# Altium PCB TK511_DC-PSU.PcbDoc
Units mm, origin at the board's own origin, x right, y up, seen from the top; angles counter-clockwise.
Board outline 60.32 x 53.97 mm, 2 copper layers (Top Layer, Bottom Layer); 24 components, 8 nets, 57 pads, 6 vias.
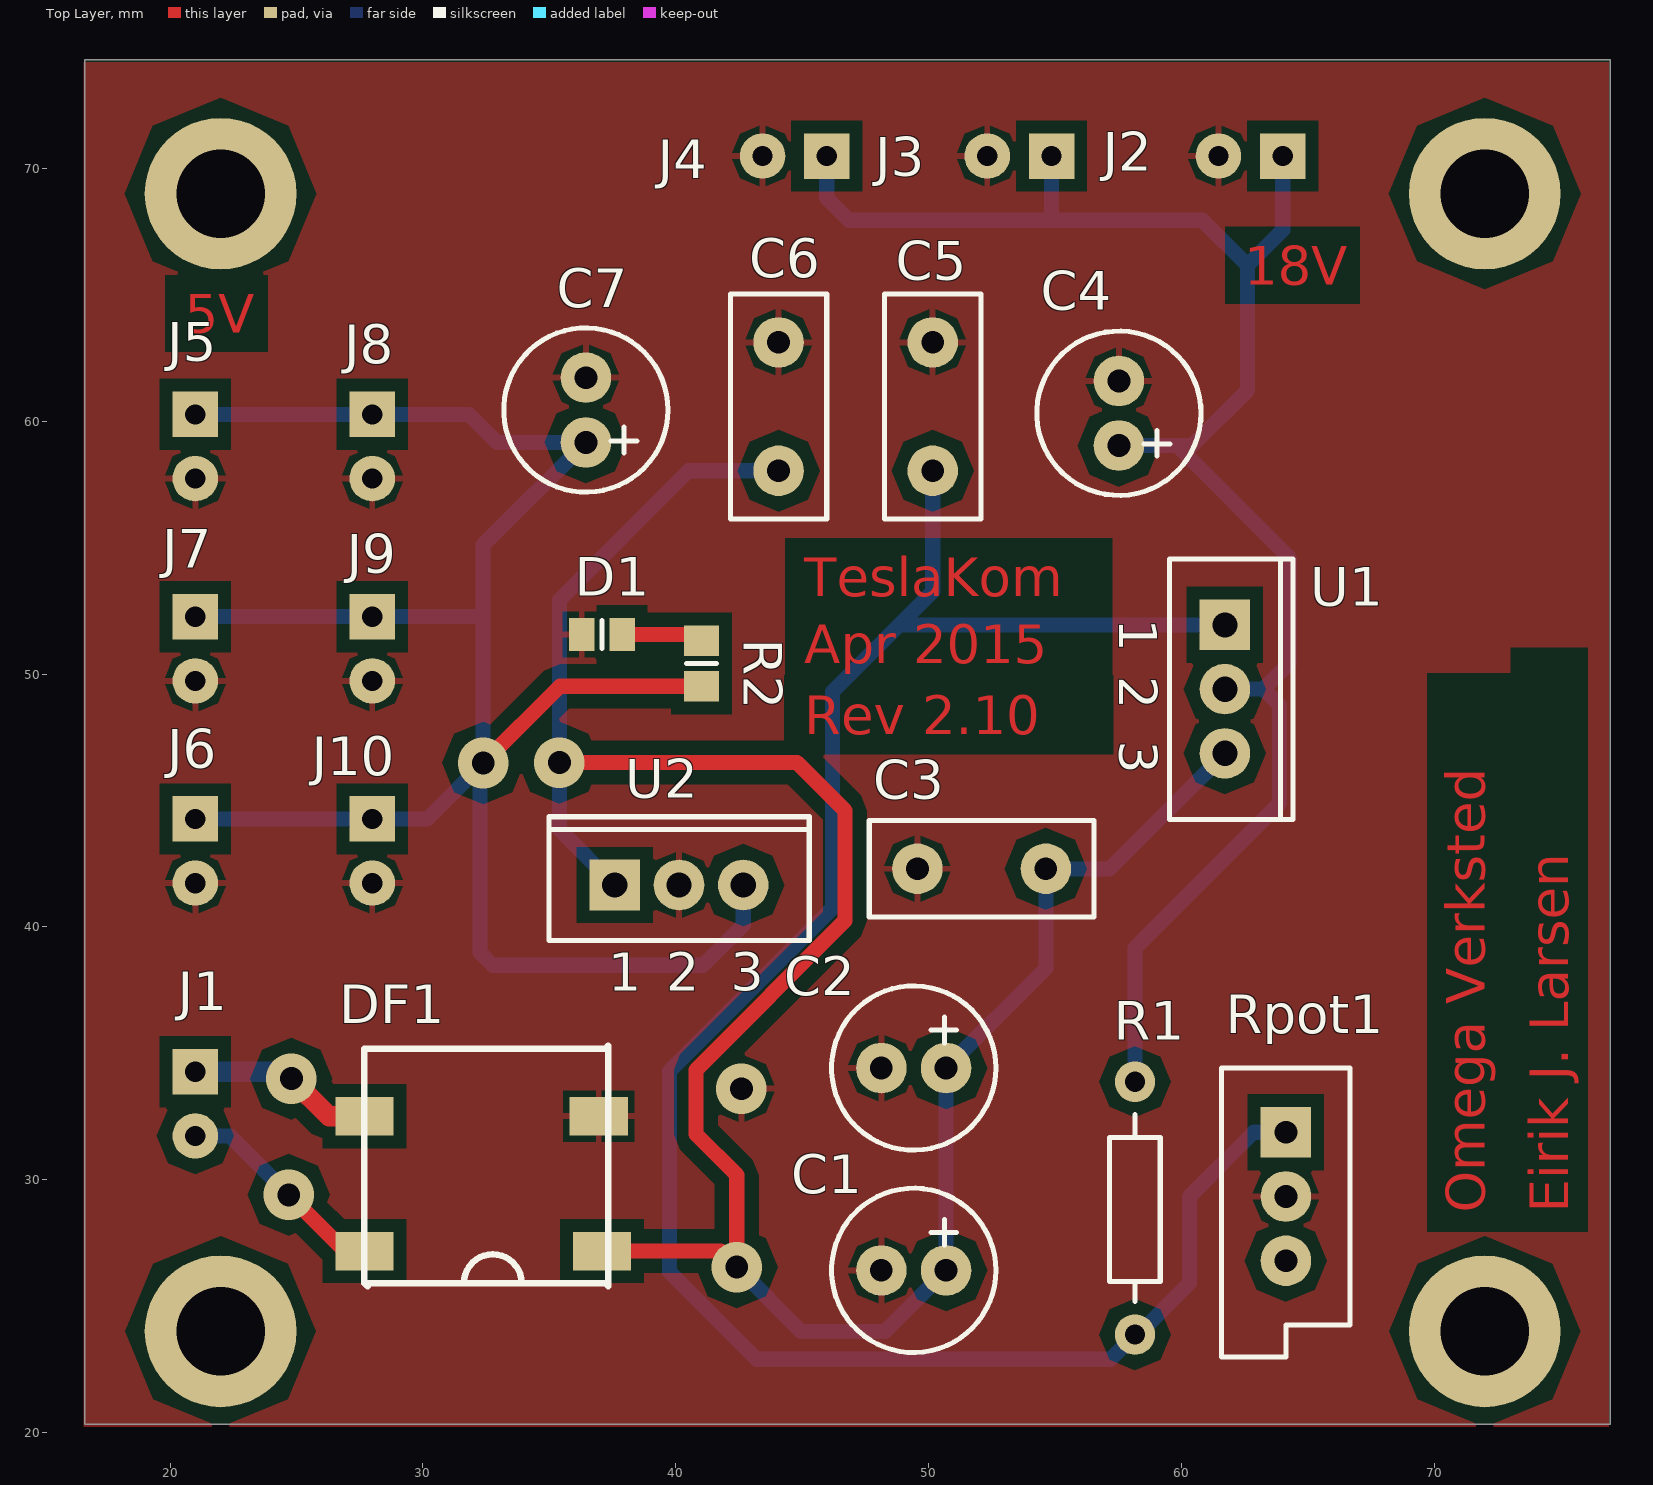
[diagram p0: Top Layer view]
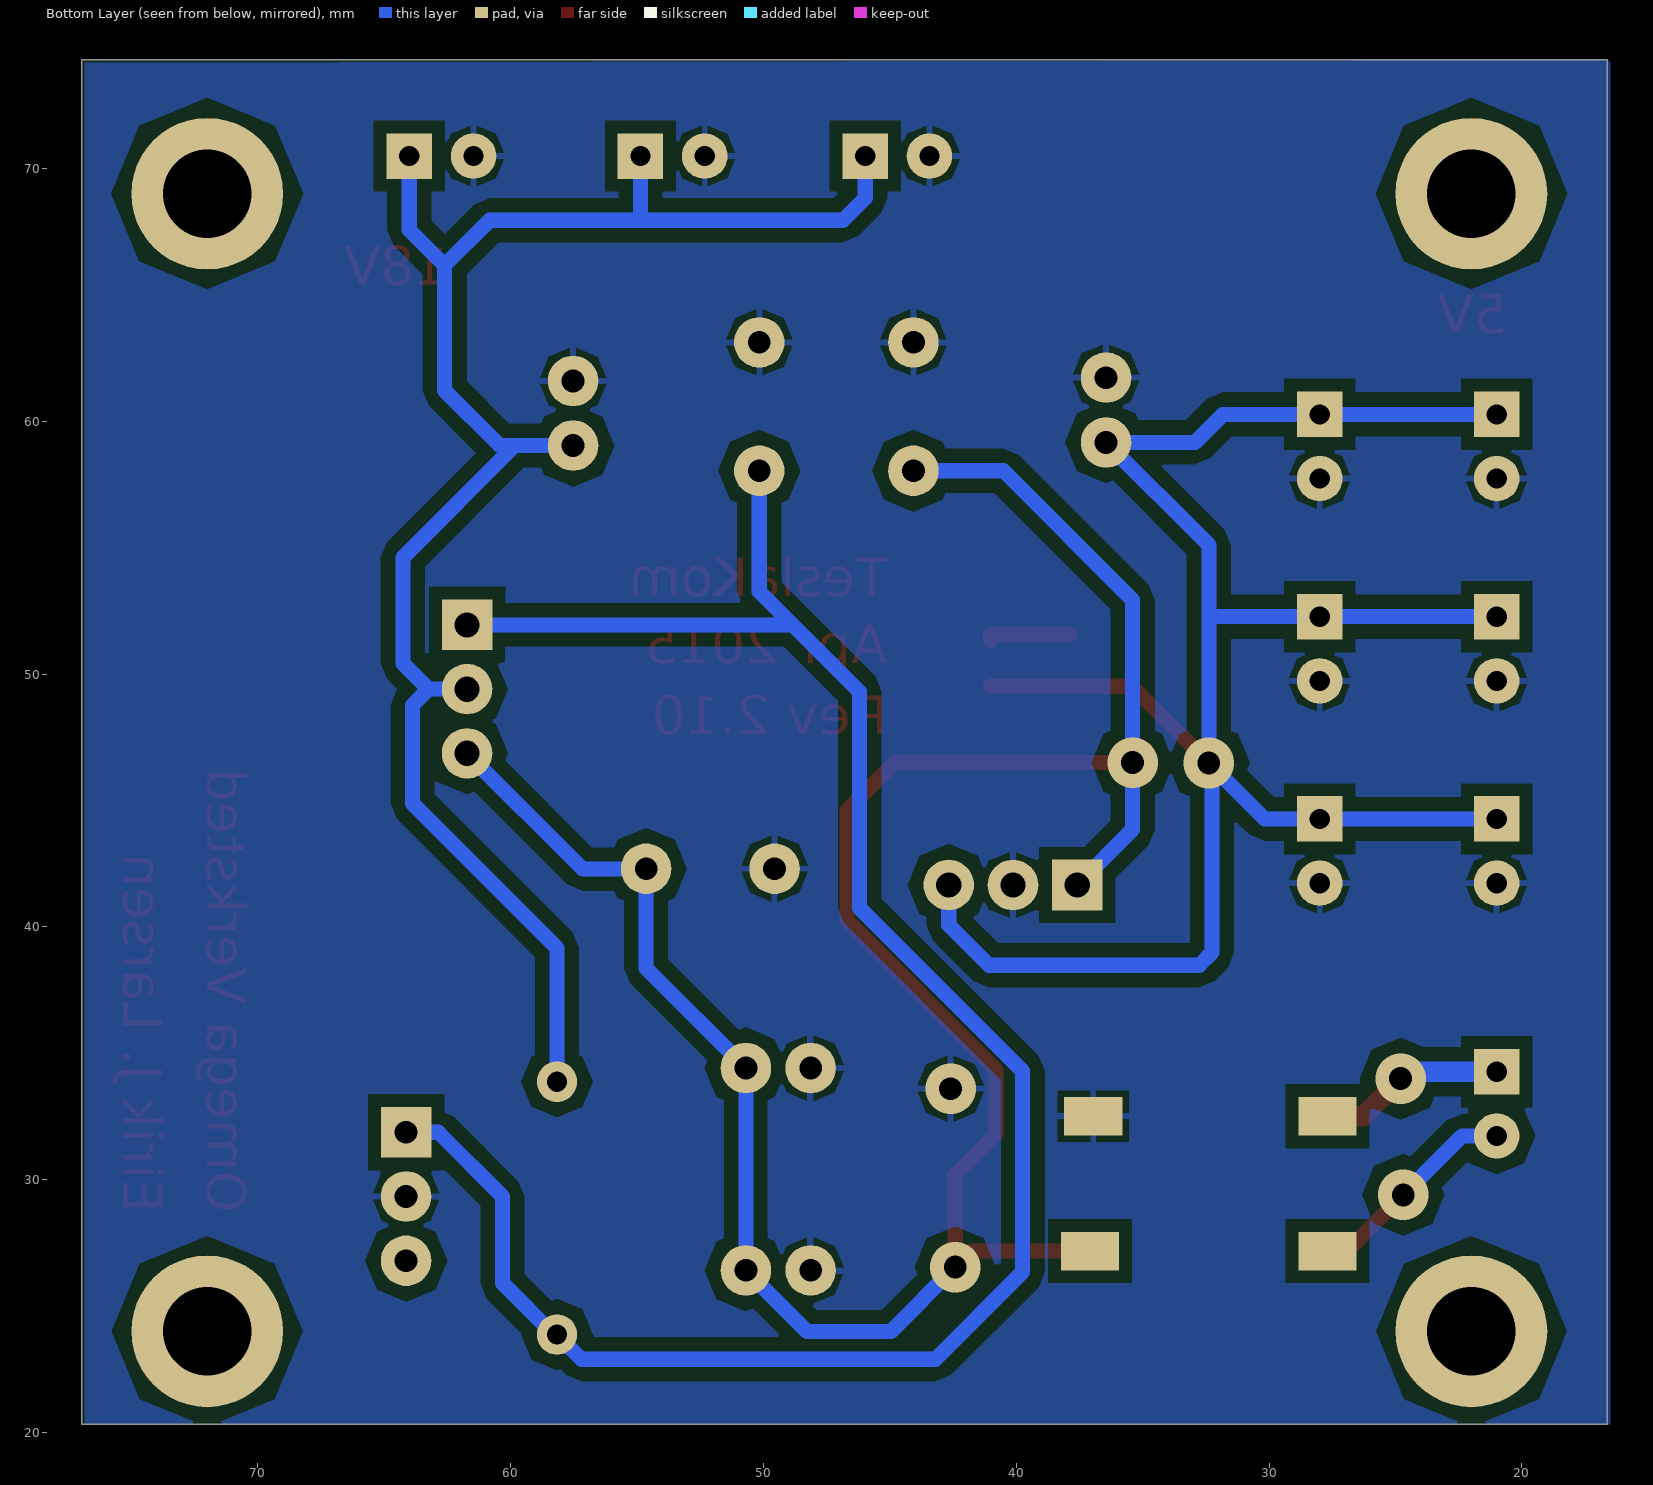
[diagram p1: Bottom Layer view, seen from below]

## Layer stack, top to bottom
Top Solder: solder mask 0.0102, Solder Resist, Dk 3.5
Top Layer: signal copper 0.0356
Dielectric1: dielectric 0.32, FR-4, Dk 4.8
Bottom Layer: signal copper 0.0356
Bottom Solder: solder mask 0.0102, Solder Resist, Dk 3.5

## Board outline
16.637,74.295 16.637,20.32 76.835,20.32 76.962,20.32 76.962,74.295

## Design rules (kind name [scope] priority, off if disabled: settings)
Clearance [All] p1: gap=0.16 except(0: Arc-Text Track-Text SMDPad-Text THPad-Text Via-Text Fill-Text Poly-Text Region-Text Text-Text)
Height [All] p1: minheight=0 maxheight=200 prefheight=12.7
HoleSize [All] p1: absolutevalues=TRUE maxlimit=6.35 minlimit=0.3 maxpercent=80.000 minpercent=20.000
MinimumSolderMaskSliver [All] p1: minsoldermaskwidth=0.1
PlaneClearance [All] p1: clearance=1
PlaneConnect [All] p1: planeconnectstyle=Relief reliefexpansion=0.508 reliefentries=4 reliefconductorwidth=1 reliefairgap=0.254
PolygonConnect [All] p1: connectstyle=Direct reliefconductorwidth=0.254 reliefentries=4 polygonreliefangle="90 Angle" airgapwidth=0.254
RoutingVias [All] p1: holewidth=0.711 width=1.27 viastyle="Through Hole" minholewidth=0.711 minwidth=1.27 maxholewidth=0.711 maxwidth=1.27
SilkToSolderMaskClearance [IsPad] p1: minsilkscreentomaskgap=0.178 clearancetoexposedcopper=TRUE
SolderMaskExpansion [All] p1: expansion=0.102
Width [All] p1: maxlimit=10 minlimit=0.16 preferedwidth=0.4
24 further rules are at their usual default settings.

## Components (designator, comment, footprint, x,y, rotation, side; value= is the part's Value field where it differs from the comment)
C1 "100U" "CAP 2.5mm" 48.133,26.416 r0 top
C2 "100U" "CAP 2.5mm" 48.133,34.417 r0 top
C3 "100N" RAD-0.2 52.1,42.3 r0 top
C4 "100U" "CAP 2.5mm" 57.531,61.595 r270 top
C5 "100N" RAD-0.2 50.165,60.579 r270 top
C6 "100N" RAD-0.2 44.069,60.579 r270 top
C7 "100U" "CAP 2.5mm" 36.449,61.722 r270 top
D1 "LED2" 6-0805_L 37.084,51.562 r180 top
DF1 "DF01S" DF01S_PCB 27.051,27.178 r0 top
J1 "PWR Input" "JST 2pin" 21,33 r180 top
J2 "18V out" "JST 2pin" 62.738,70.485 r90 top
J3 "18V out" "JST 2pin" 53.594,70.485 r90 top
J4 "18V out" "JST 2pin" 44.704,70.485 r90 top
J5 "5V out" "JST 2pin" 21,59 r180 top
J6 "5V out" "JST 2pin" 21,43 r180 top
J7 "5V out" "JST 2pin" 21,51 r180 top
J8 "5V out" "JST 2pin" 28,59 r180 top
J9 "5V out" "JST 2pin" 28,51 r180 top
J10 "5V out" "JST 2pin" 28,43 r180 top
R1 "3K3" "Axial 1/4W" 58.166,23.876 r90 top
R2 "470" 6-0805_N 41.021,50.419 r270 top
Rpot1 "RPot" VR5 64.135,29.337 r270 top
U1 "LM317T" 221A-06 61.722,49.403 r270 top
U2 "LM7805" 221A-06 40.132,41.656 r0 top

## Footprints (in the part's own frame and the unit in brackets; to place one, negate y for a bottom-side part, rotate by r counter-clockwise, add the part's x,y. Pads: shape width x height; smd on the part's side, far side on the other; paste and mask are expansions set on the pad)
6-0805_L [mm] "Chip Resistor, Body 2.0x1.2mm, IPC High Density"
  rect 1x1.3 smd: 1(-0.8,0) 2(0.8,0)
  silkscreen extent 0,-0.55 0,0.55, body extent -1.07,-0.7 1.07,0.7, height 0.7
6-0805_N [mm] "Chip Resistor, Body 2.0x1.2mm, IPC Medium Density"
  rect 1.2x1.4 smd: 1(-0.9,0) 2(0.9,0)
  silkscreen extent 0,-0.6 0,0.6, body extent -1.07,-0.7 1.07,0.7, height 0.7
221A-06 [mm] "TO, Thru-Hole, Vertical, Heatsink Mounted; 3 In-Line Leads; Pitch 2.54 mm"
  rect 2x2 hole 1: 1(-2.54,0)
  round 2 hole 1: 2(0,0) 3(2.54,0)
  silkscreen extent -5.15,-2.2 5.15,2.7
"Axial 1/4W" [mm]
  round 1.6 hole 0.8: 1(0,0) 2(10,0)
  silkscreen extent 1.3,-1 8.7,1
"CAP 2.5mm" [mm]
  round 2 hole 0.9: 1(0,0) 2(2.56,0)
  silkscreen extent -1.97,-3.25 4.53,3.25
DF01S_PCB [mil] "Likeretterbro"
  rect 90.55x60 all layers, no hole: 1(25,0) 2(25,210) 3(395,0) 4(390,210)
  silkscreen extent 25,-55 405,320, body extent 25,-50 405,320, height 157
"JST 2pin" [mm]
  rect 1.8x1.8 hole 0.8: 1(0,-1.27)
  round 1.8 hole 0.8: 2(0,1.27)
  body extent -2.4,-3.7 3.35,3.7, height 7
RAD-0.2 [mm] "Radial Cap, Thru-Hole; 2 Leads; 0.2 in Pin Spacing"
  round 2 hole 0.9: 1(-2.54,0) 2(2.54,0)
  silkscreen extent -4.44,-1.91 4.44,1.91
VR5 [mm] "Thru-Hole; 3 Leads"
  rect 2x2 hole 0.9: 1(-2.54,0)
  round 2 hole 0.9: 2(0,0) 3(2.54,0)
  silkscreen extent -5.08,-2.54 6.35,2.54

## Part data
C1 C2 C3 C4 C5 C6 C7: library part CAP
D1: "Typical RED, GREEN, YELLOW, AMBER GaAs LED"
DF1: "Likeretterbro"
J1 J2 J3 J4 J5 J6 J7 J8 J9 J10: library part "JST 2pin"
R1 R2: library part R
Rpot1: "Potentiometer"
U1: "Three-Terminal Adjustable Output Positive Voltage Regulator"

## Free pads (board coordinates)
  round 6 hole 3.5: 0(72,24) 1(22,69) 1(72,69) 3(22,24)

## Via types
v1: diameter 2, hole 0.9, Top Layer to Bottom Layer, 6 vias

## Nets (pads, with @x,y where several pads share a name; then routed paths per layer and width w, separated by ;. In a path a pad name is that pad's centre, name@x,y a point inside that pad or via, vN(x,y) a via of type N, cw(c..) or ccw(c..) an arc to the next point about the centre after c; other vN are vias at no path point)
5V: C7.2 J5.1 J6.1 J7.1 J8.1 J9.1 J10.1 R2.2 U2.3 | length 84.1
  Top Layer w0.6: v1(32.385,46.482) 35.422,49.519 R2.2
  Bottom Layer w0.6: J6.1 J10.1 30.173,44.27 v1@32.258,46.355 ; J7.1 J9.1 32.315,52.27 32.385,52.2 ; J5.1 J8.1 31.83,60.27 32.938,59.162 C7.2 32.385,55.098 32.385,52.2 ; U2.3 42.672,40.072 41.081,38.481 32.766,38.481 32.258,38.989 v1@32.258,46.355 ; v1@32.258,46.355 v1(32.385,46.482) 32.385,52.2
18V: C4.2 J2.1 J3.1 J4.1 R1.2 U1.2 | length 69.4
  Bottom Layer w0.6: J4.1 45.974,68.834 46.863,67.945 54.8,67.945 ; J3.1 54.864,68.009 54.8,67.945 ; C4.2 59.837,59.035 ; R1.2 58.166,39.166 63.881,44.881 63.881,48.768 63.246,49.403 ; U1.2 63.246,49.403 ; J2.1 64.008,67.564 62.611,66.167 ; 54.8,67.945 60.833,67.945 62.611,66.167 ; 59.837,59.035 60.432,59.035 62.611,61.214 62.611,66.167 ; 59.837,59.035 64.262,54.61 64.262,50.419 63.246,49.403
GND: C1.1 C2.1 C3.1 C4.1 C5.1 C6.1 C7.1 D1.2 DF1.4 J2.2 J3.2 J4.2 J5.2 J6.2 J7.2 J8.2 J9.2 J10.2 Rpot1.2 U2.2
  other v1: 42.6,33.6
NetC5_2: C5.2 R1.1 Rpot1.1 U1.1 | length 80.4
  Bottom Layer w0.6: C5.2 50.165,53.265 48.843,51.943 ; U1.1 48.843,51.943 ; Rpot1.1 62.865,31.877 60.325,29.337 60.325,25.908 58.293,23.876 R1.1 57.19,22.9 43.2,22.9 39.751,26.349 39.751,34.3 46.2,40.749 46.2,49.3 48.843,51.943
NetD1_1: D1.1 R2.1 | length 3.4
  Top Layer w0.6: D1.1 41.021,51.562 R2.1
NetDF1_1: DF1.1 J1.2 | length 8.6
  Top Layer w0.6: v1(24.7,29.4) 26.922,27.178 DF1.1
  Bottom Layer w0.6: J1.2 22.37,31.73 v1(24.7,29.4)
NetDF1_2: DF1.2 J1.1 | length 7.4
  Top Layer w0.8: v1(24.8,34) 26.288,32.512 DF1.2
  Bottom Layer w0.8: J1.1 24.53,34.27 v1(24.8,34)
VIN: C1.2 C2.2 C3.2 C6.2 DF1.3 U1.3 U2.1 | length 98.6
  Top Layer w0.6: v1(35.4,46.5) 44.8,46.5 46.7,44.6 46.7,40.246 40.8,34.346 40.8,31.8 42.418,30.182 v1(42.418,26.543) 41.783,27.178 DF1.3
  Bottom Layer w0.6: U2.1 35.4,43.848 v1(35.4,46.5) 35.4,52.926 40.513,58.039 C6.2 ; v1(42.418,26.543) 44.961,24 48.277,24 C1.2 C2.2 54.64,38.364 54.64,42.291 57.15,42.291 U1.3
pads on no net: Rpot1.3

## Polygon pours and split planes (outlines as drawn)
GND on Top Layer "Top Layer-No Net" (solid, pour order 10): 16.58,74.2 16.58,20.225 77.032,20.225 76.905,20.225 76.905,74.2
GND on Bottom Layer "Top Layer-No Net" (solid, pour order 12): 16.51,74.295 16.51,20.32 76.835,20.32 76.835,74.168

## Other copper
Top Layer:
  text "18V" at 62.484,65.405 h1.52
  text "5V" at 20.574,63.5 h1.52
  text "TeslaKom" at 45.085,53.086 h1.52
  text "Apr 2015" at 45.085,50.419 h1.52
  text "Rev 2.10" at 45.085,47.625 h1.52
  text "Omega Verksted" at 72.009,28.702 h1.52 r90
  text "Eirik J. Larsen" at 75.311,28.702 h1.52 r90

## Text inside footprints (layer, text, board x,y; h text height)
U1: Top Overlay "1" at 57.547,52.193 h1.5 r270; Top Overlay "2" at 57.547,49.903 h1.5 r270; Top Overlay "3" at 57.547,47.363 h1.5 r270
U2: Top Overlay "1" at 37.342,37.481 h1.5; Top Overlay "2" at 39.632,37.481 h1.5; Top Overlay "3" at 42.172,37.481 h1.5